# Altium PCB zynqBoard.PcbDoc
Units mm, origin at the board's own origin, x right, y up, seen from the top; angles counter-clockwise.
Board outline 209.68 x 85.72 mm, 2 copper layers (Top Layer, Bottom Layer); 108 components, 127 nets, 535 pads, 137 vias.
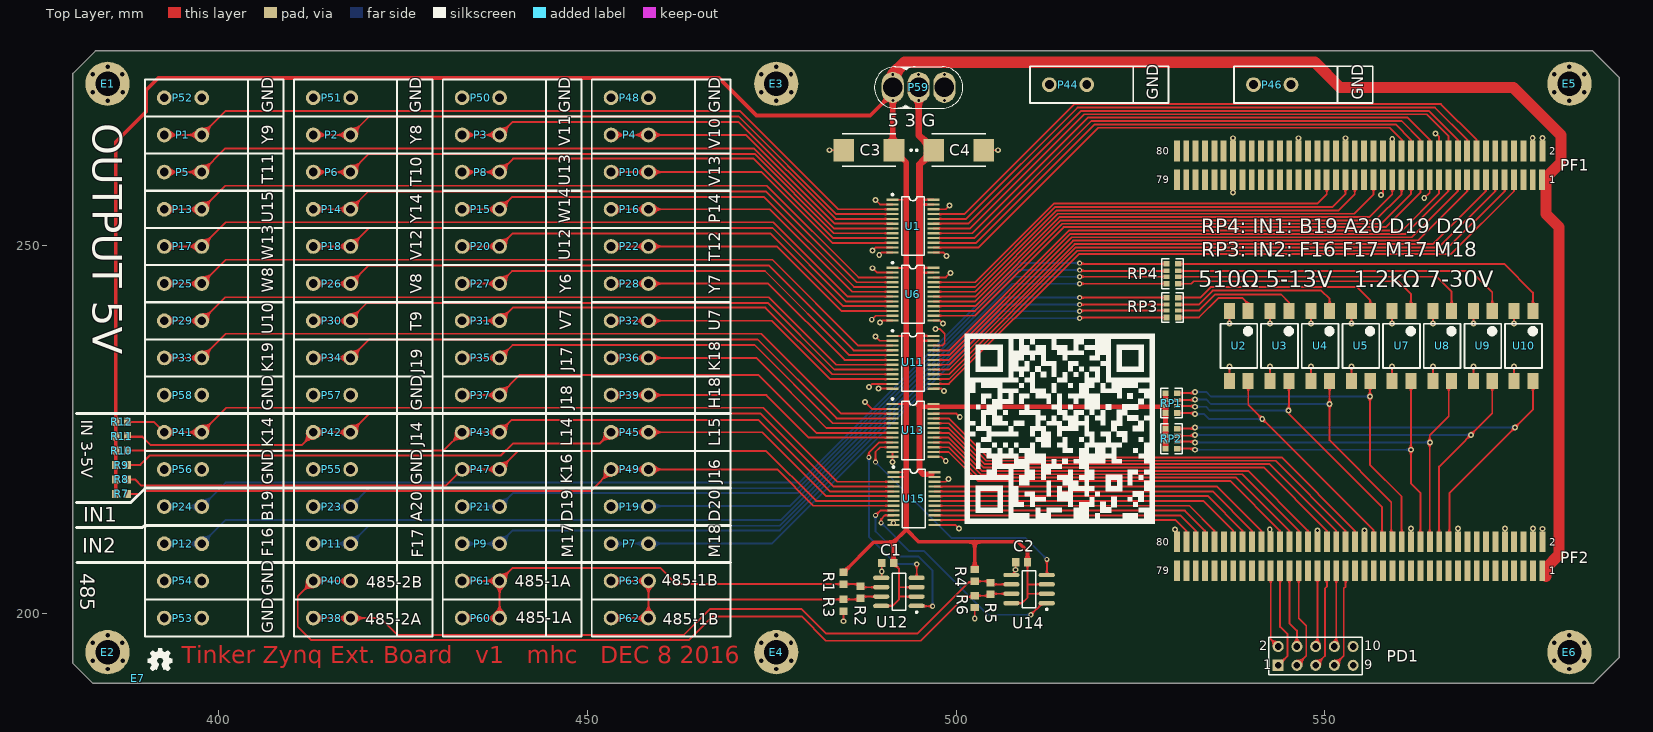
[diagram p0: Top Layer view]
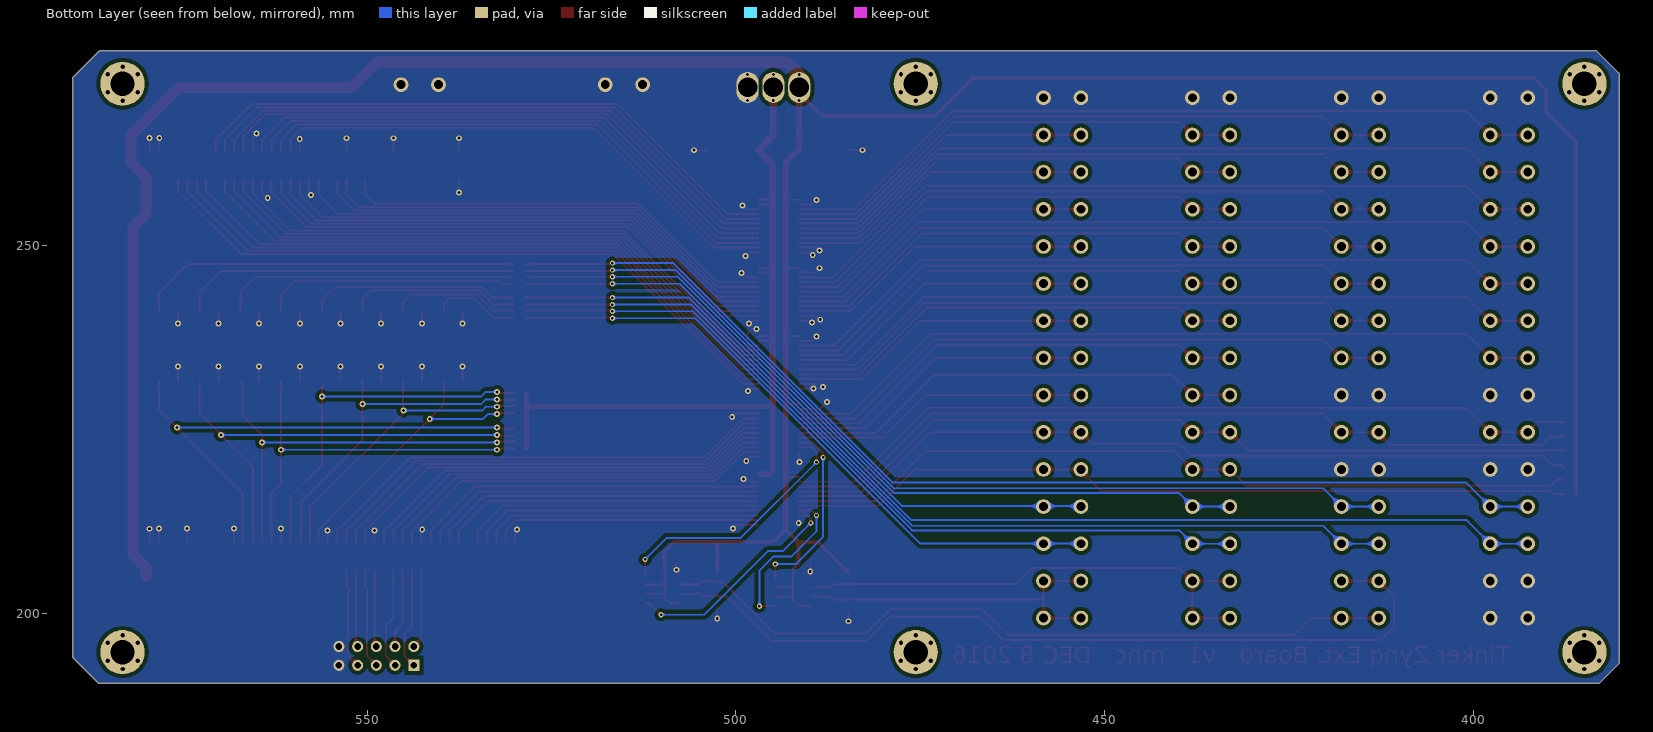
[diagram p1: Bottom Layer view, seen from below]

## Layer stack, top to bottom
Top Solder: solder mask 0.0102, Solder Resist, Dk 3.5
Top Layer: signal copper 0.0356
Dielectric 1: dielectric 0.32, FR-4, Dk 4.8
Bottom Layer: signal copper 0.0356
Bottom Solder: solder mask 0.0102, Solder Resist, Dk 3.5

## Board outline
380.238,193.294 382.905,190.627 586.486,190.627 589.915,194.056 589.915,272.796 586.359,276.352 383.286,276.352 380.238,273.304

## Design rules (kind name [scope] priority, off if disabled: settings)
Clearance [All] p1: gap=0.203 except(0.508: Arc-Poly Track-Poly SMDPad-Poly THPad-Poly Via-Poly Fill-Poly Poly-Poly)
HoleSize [All] p1: absolutevalues=TRUE maxlimit=6.3 minlimit=0.2 maxpercent=80.000 minpercent=20.000
HoleToHoleClearance [All] p1: gap=0.1 allowstackedmicrovias=TRUE
MinimumSolderMaskSliver [All] p1: minsoldermaskwidth=0.1
PlaneConnect [All] p1: planeconnectstyle=Direct reliefexpansion=0.508 reliefentries=4 reliefconductorwidth=0.254 reliefairgap=0.254
PolygonConnect [All] p1: connectstyle=Direct reliefconductorwidth=0.254 reliefentries=4 polygonreliefangle="90 Angle" airgapwidth=0.254
RoutingVias [All] p1: holewidth=0.3 width=0.6 viastyle="Through Hole" minholewidth=0.3 minwidth=0.6 maxholewidth=7 maxwidth=8
SilkToSilkClearance [All] p1: silktosilkclearance=0.1
SilkToSolderMaskClearance [IsPad] p1: minsilkscreentomaskgap=0.1 clearancetoexposedcopper=TRUE
SolderMaskExpansion [All] p1: expansion=0.102
Width [All] p1: maxlimit=2.54 minlimit=0.203 preferedwidth=0.254
24 further rules are at their usual default settings.

## Components (designator, comment, footprint, x,y, rotation, side; value= is the part's Value field where it differs from the comment)
C1 "Cap" 1608[0603]big 490.728,206.883 r0 top
C2 "Cap" 1608[0603]big 508.889,207.01 r0 top
C3 "Cap2" AVX_D_7343-31 488.188,262.89 r180 top
C4 "Cap2" AVX_D_7343-31 500.38,262.89 r0 top
E1 "铜柱" 铜柱孔 384.937,271.907 r180 top
E2 "铜柱" 铜柱孔 384.937,194.818 r180 top
E3 "铜柱" 铜柱孔 475.615,271.907 r180 top
E4 "铜柱" 铜柱孔 475.615,194.818 r180 top
E5 "铜柱" 铜柱孔 583.184,271.907 r180 top
E6 "铜柱" 铜柱孔 583.184,194.818 r180 top
E7 "OSH" OPENSOURECE 389.001,191.262 r0 top
P1 "Y9" HEADER_5.08MM_SINGLE 390,264.96 r90 top
P2 "Y8" HEADER_5.08MM_SINGLE 410.199,264.96 r90 top
P3 "V11" HEADER_5.08MM_SINGLE 430.397,264.96 r90 top
P4 "V10" HEADER_5.08MM_SINGLE 450.596,264.96 r90 top
P5 "T11" HEADER_5.08MM_SINGLE 390,259.92 r90 top
P6 "T10" HEADER_5.08MM_SINGLE 410.199,259.92 r90 top
P7 "M18" HEADER_5.08MM_SINGLE 450.596,209.52 r90 top
P8 "U13" HEADER_5.08MM_SINGLE 430.397,259.92 r90 top
P9 "M17" HEADER_5.08MM_SINGLE 430.397,209.52 r90 top
P10 "V13" HEADER_5.08MM_SINGLE 450.596,259.92 r90 top
P11 "F17" HEADER_5.08MM_SINGLE 410.199,209.52 r90 top
P12 "F16" HEADER_5.08MM_SINGLE 390,209.52 r90 top
P13 "U15" HEADER_5.08MM_SINGLE 390,254.88 r90 top
P14 "Y14" HEADER_5.08MM_SINGLE 410.199,254.88 r90 top
P15 "W14" HEADER_5.08MM_SINGLE 430.397,254.88 r90 top
P16 "P14" HEADER_5.08MM_SINGLE 450.596,254.88 r90 top
P17 "W13" HEADER_5.08MM_SINGLE 390,249.84 r90 top
P18 "V12" HEADER_5.08MM_SINGLE 410.199,249.84 r90 top
P19 "D20" HEADER_5.08MM_SINGLE 450.596,214.56 r90 top
P20 "U12" HEADER_5.08MM_SINGLE 430.397,249.84 r90 top
P21 "D19" HEADER_5.08MM_SINGLE 430.397,214.56 r90 top
P22 "T12" HEADER_5.08MM_SINGLE 450.596,249.84 r90 top
P23 "A20" HEADER_5.08MM_SINGLE 410.199,214.56 r90 top
P24 "B19" HEADER_5.08MM_SINGLE 390,214.56 r90 top
P25 "W8" HEADER_5.08MM_SINGLE 390,244.8 r90 top
P26 "V8" HEADER_5.08MM_SINGLE 410.199,244.8 r90 top
P27 "Y6" HEADER_5.08MM_SINGLE 430.397,244.8 r90 top
P28 "Y7" HEADER_5.08MM_SINGLE 450.596,244.8 r90 top
P29 "U10" HEADER_5.08MM_SINGLE 390,239.76 r90 top
P30 "T9" HEADER_5.08MM_SINGLE 410.199,239.76 r90 top
P31 "V7" HEADER_5.08MM_SINGLE 430.397,239.76 r90 top
P32 "U7" HEADER_5.08MM_SINGLE 450.596,239.76 r90 top
P33 "K19" HEADER_5.08MM_SINGLE 390,234.72 r90 top
P34 "J19" HEADER_5.08MM_SINGLE 410.199,234.72 r90 top
P35 "J17" HEADER_5.08MM_SINGLE 430.397,234.72 r90 top
P36 "K18" HEADER_5.08MM_SINGLE 450.596,234.72 r90 top
P37 "J18" HEADER_5.08MM_SINGLE 430.397,229.68 r90 top
P38 "485-2A" HEADER_5.08MM_SINGLE 410.199,199.44 r90 top
P39 "H18" HEADER_5.08MM_SINGLE 450.596,229.68 r90 top
P40 "485-2B" HEADER_5.08MM_SINGLE 410.199,204.48 r90 top
P41 "K14" HEADER_5.08MM_SINGLE 390,224.64 r90 top
P42 "J14" HEADER_5.08MM_SINGLE 410.199,224.64 r90 top
P43 "L14" HEADER_5.08MM_SINGLE 430.397,224.64 r90 top
P44 "GND" HEADER_5.08MM_SINGLE 510.032,271.78 r90 top
P45 "L15" HEADER_5.08MM_SINGLE 450.596,224.64 r90 top
P46 "GND" HEADER_5.08MM_SINGLE 537.718,271.78 r90 top
P47 "K16" HEADER_5.08MM_SINGLE 430.397,219.6 r90 top
P48 "GND" HEADER_5.08MM_SINGLE 450.596,270 r90 top
P49 "J16" HEADER_5.08MM_SINGLE 450.596,219.6 r90 top
P50 "GND" HEADER_5.08MM_SINGLE 430.397,270 r90 top
P51 "GND" HEADER_5.08MM_SINGLE 410.199,270 r90 top
P52 "GND" HEADER_5.08MM_SINGLE 390,270 r90 top
P53 "GND" HEADER_5.08MM_SINGLE 390,199.44 r90 top
P54 "GND" HEADER_5.08MM_SINGLE 390,204.48 r90 top
P55 "GND" HEADER_5.08MM_SINGLE 410.199,219.6 r90 top
P56 "GND" HEADER_5.08MM_SINGLE 390,219.6 r90 top
P57 "GND" HEADER_5.08MM_SINGLE 410.199,229.68 r90 top
P58 "GND" HEADER_5.08MM_SINGLE 390,229.68 r90 top
P59 "POWER" MR30 494.919,271.399 r90 top
P60 "485-1A" HEADER_5.08MM_SINGLE 430.397,199.44 r90 top
P61 "485-1A" HEADER_5.08MM_SINGLE 430.397,204.48 r90 top
P62 "485-1B" HEADER_5.08MM_SINGLE 450.596,199.44 r90 top
P63 "485-1B" HEADER_5.08MM_SINGLE 450.596,204.48 r90 top
PD1 "DEBUG" HDR2X5 543.687,193.04 r0 top
PF1 "MHDR2*40" sbMHeader2*40 529.946,258.88 r0 top
PF2 "MHDR2*40" sbMHeader2*40 529.971,205.867 r0 top
R1 "Res2" 1608[0603]big 484.759,204.851 r90 top
R2 "Res2" 1608[0603]big 487.045,202.946 r90 top
R3 "Res2" 1608[0603]big 484.759,201.168 r90 top
R4 "Res2" 1608[0603]big 502.539,205.232 r90 top
R5 "Res2" 1608[0603]big 504.698,203.454 r90 top
R6 "Res2" 1608[0603]big 502.539,201.676 r90 top
R7 "" 1608[0603]big 386.842,216.281 r0 top
R8 "" 1608[0603]big 386.842,218.237 r0 top
R9 "" 1608[0603]big 386.842,220.193 r0 top
R10 "" 1608[0603]big 386.842,222.148 r0 top
R11 "" 1608[0603]big 386.842,224.104 r0 top
R12 "" 1608[0603]big 386.842,226.06 r0 top
RP1 "ResPack" LC-0603_Rx4 529.209,228.6 r90 top
RP2 "ResPack" LC-0603_Rx4 529.209,223.774 r90 top
RP3 "ResPack" LC-0603_Rx4 529.336,241.554 r90 top
RP4 "ResPack" LC-0603_Rx4 529.336,246.126 r90 top
U1 "SN74LVC4245PW" PW024 494.157,252.603 r270 top
U2 "Optoisolator1" LC-SMD-4 538.353,236.347 r270 top
U3 "Optoisolator1" LC-SMD-4 543.868,236.347 r270 top
U4 "Optoisolator1" LC-SMD-4 549.384,236.347 r270 top
U5 "Optoisolator1" LC-SMD-4 554.899,236.347 r270 top
U6 "SN74LVC4245PW" PW024 494.157,243.364 r270 top
U7 "Optoisolator1" LC-SMD-4 560.415,236.347 r270 top
U8 "Optoisolator1" LC-SMD-4 565.93,236.347 r270 top
U9 "Optoisolator1" LC-SMD-4 571.446,236.347 r270 top
U10 "Optoisolator1" LC-SMD-4 576.961,236.347 r270 top
U11 "SN74LVC4245PW" PW024 494.157,234.124 r270 top
U12 "MAX485CSA" NSO8_N 492.252,202.993 r180 top
U13 "SN74LVC4245PW" PW024 494.157,224.885 r270 top
U14 "MAX485CSA" NSO8_N 509.905,203.374 r180 top
U15 "SN74LVC4245PW" PW024 494.284,215.646 r270 top

## Footprints (in the part's own frame and the unit in brackets; to place one, negate y for a bottom-side part, rotate by r counter-clockwise, add the part's x,y. Pads: shape width x height; smd on the part's side, far side on the other; paste and mask are expansions set on the pad)
1608[0603]big [mm] "Chip Capacitor, Body 1.6x0.8mm, IPC High Density"
  rect 1x1.1 smd: 1(-0.8,0) 2(0.8,0)
  body extent -0.87,-0.48 0.87,0.48, height 1.3
AVX_D_7343-31 [mm]
  rect 2.8x3 smd: 1(-3.4,0) 2(3.4,0)
  silkscreen extent -5.84,-2.2 3.65,2.2
HDR2X5 [mm] "Connector; Header; 5x2 Position"
  rect 1.5x1.5 hole 0.9: 1(0,0)
  round 1.5 hole 0.9: 2(0,2.54) 3(2.54,0) 4(2.54,2.54) 5(5.08,0) 6(5.08,2.54) 7(7.62,0) 8(7.62,2.54) 9(10.16,0) 10(10.16,2.54)
  silkscreen extent -1.27,-1.27 11.43,3.81
HEADER_5.08MM_SINGLE [mm]
  round 2 hole 1.2: 1(0,-2.62) 1(0,-7.7)
  silkscreen extent -2.5,-18.8 2.5,0
LC-0603_Rx4 [mm]
  rect 0.75x0.84 smd mask+0.051: 1(-1.35,-0.8) 4(1.35,-0.8) 5(1.35,0.8) 8(-1.35,0.8)
  rect 0.58x0.84 smd mask+0.051: 2(-0.4,-0.8) 3(0.4,-0.8) 6(0.4,0.8) 7(-0.4,0.8)
  silkscreen extent -2.03,-1.47 2.02,1.47
LC-SMD-4 [mm]
  rect 2.2x1.5 smd: 1(-4.75,1.27) 2(-4.75,-1.27) 3(4.75,-1.27) 4(4.75,1.27)
  silkscreen extent -3,-2.5 3,2.5
MR30 [mm]
  oval 4.2x3 hole 2.65: 1(0,3.5) 2(0,0) 3(0,-3.5)
  silkscreen extent -2.8,-6 2.8,6
NSO8_N [mm] "SOIC, 8-Leads, Body 4.9x3.9mm, Pitch 1.27mm, IPC Medium Density"
  oval 2.2x0.6 smd: 1(-2.4,1.905) 2(-2.4,0.635) 3(-2.4,-0.635) 4(-2.4,-1.905) 5(2.4,-1.905) 6(2.4,-0.635) 7(2.4,0.635) 8(2.4,1.905)
  silkscreen extent -2.53,-2.5 0.9,2.88, body extent -2,-2.5 2,2.5, height 1.75
OPENSOURECE [mm]
  silkscreen extent 1.4,1.09 4.74,4.1
PW024 [mm] "Shrink Small Outline; 24 Leads; Body Width 4.4 mm; Pitch 0.65 mm"
  rect 0.3x1.65 smd: 1(-3.575,-2.775) 2(-2.925,-2.775) 3(-2.275,-2.775) 4(-1.625,-2.775) 5(-0.975,-2.775) 6(-0.325,-2.775) 7(0.325,-2.775) 8(0.975,-2.775) 9(1.625,-2.775) 10(2.275,-2.775) 11(2.925,-2.775) 12(3.575,-2.775) 13(3.575,2.775) 14(2.925,2.775) 15(2.275,2.775) 16(1.625,2.775) 17(0.975,2.775) 18(0.325,2.775) 19(-0.325,2.775) 20(-0.975,2.775) 21(-1.625,2.775) 22(-2.275,2.775) 23(-2.925,2.775) 24(-3.575,2.775)
  silkscreen extent -4.4,-2.9 3.95,1.55
sbMHeader2*40 [mm]
  rect 0.8x2.8 smd: 1(49.53,0) 2(49.56,3.9) 3(48.26,0) 4(48.26,3.9) 5(46.99,0) 6(46.99,3.9) 7(45.72,0) 8(45.72,3.9) 9(44.45,0) 10(44.45,3.9) 11(43.18,0) 12(43.18,3.9) 13(41.91,0) 14(41.91,3.9) 15(40.64,0) 16(40.64,3.9) 17(39.37,0) 18(39.37,3.9) 19(38.1,0) 20(38.1,3.9) 21(36.83,0) 22(36.83,3.9) 23(35.56,0) 24(35.56,3.9) 25(34.29,0) 26(34.29,3.9) 27(33.02,0) 28(33.02,3.9) 29(31.75,0) 30(31.75,3.9) 31(30.48,0) 32(30.48,3.9) 33(29.21,0) 34(29.21,3.9) 35(27.94,0) 36(27.94,3.9) 37(26.67,0) 38(26.67,3.9) 39(25.4,0) 40(25.4,3.9) 41(24.13,0) 42(24.13,3.9) 43(22.86,0) 44(22.86,3.9) 45(21.59,0) 46(21.59,3.9) 47(20.32,0) 48(20.32,3.9) 49(19.05,0) 50(19.05,3.9) 51(17.78,0) 52(17.78,3.9) 53(16.51,0) 54(16.51,3.9) 55(15.24,0) 56(15.24,3.9) 57(13.97,0) 58(13.97,3.9) 59(12.7,0) 60(12.7,3.9) 61(11.43,0) 62(11.43,3.9) 63(10.16,0) 64(10.16,3.9) 65(8.89,0) 66(8.89,3.9) 67(7.62,0) 68(7.62,3.9) 69(6.35,0) 70(6.35,3.9) 71(5.08,0) 72(5.08,3.9) 73(3.81,0) 74(3.81,3.9) 75(2.54,0) 76(2.54,3.9) 77(1.27,0) 78(1.27,3.9) 79(0,0) 80(0,3.9)
铜柱孔 [mm]
  round 6 hole 3.3: 1(0,0)

## Part data
C1 C2 C3 C4: "Capacitor"
E1 E2 E3 E4 E5 E6 E7: library part Antenna, "Generic Antenna"
P1 P2 P3 P4 P5 P6 P7 P8 P9 P10 P11 P12 P13 P14 P15 P16 P17 P18 P19 P20 P21 P22 P23 P24 P25 P26 P27 P28 P29 P30 P31 P32 P33 P34 P35 P36 P37 P38 P39 P40 P41 P42 P43 P44 P45 P46 P47 P48 P49 P50 P51 P52 P53 P54 P55 P56 P57 P58 P60 P61 P62 P63: library part conn
P59: library part XT30-3P, "XT30-3P"
PD1: library part "Header 5X2", "Header, 5-Pin, Dual row"
R1 R2 R3 R4 R5 R6: "Resistor"
R7 R8 R9 R10 R11 R12: library part Res2, "Resistor"
RP1 RP2 RP3 RP4: library part ResPackx4
U1 U6 U11 U13 U15: "Octal Bus Transceiver and 3.3-V to 5-V Shifter with 3-State Outputs"
U2 U3 U4 U5 U7 U8 U9 U10: "4-Pin Phototransistor Optocoupler"
U12 U14: "Low-Power, Slew-Rate-Limited RS-485/RS-422 Transceiver"

## Via types
v1: diameter 0.8, hole 0.4, Top Layer to Bottom Layer, tented both sides, 79 vias
v2: diameter 0.6, hole 0.6, Top Layer to Bottom Layer, tented both sides, 36 vias
v3: diameter 0.7, hole 0.35, Top Layer to Bottom Layer, tented both sides, 16 vias
v4: diameter 0.4, hole 0.4, Top Layer to Bottom Layer, tented both sides, 6 vias

## Nets (pads, with @x,y where several pads share a name; then routed paths per layer and width w, separated by ;. In a path a pad name is that pad's centre, name@x,y a point inside that pad or via, vN(x,y) a via of type N, cw(c..) or ccw(c..) an arc to the next point about the centre after c; other vN are vias at no path point)
3V3: C4.1 P59.2 RP1.5 RP1.6 RP1.7 RP1.8 RP2.5 RP2.6 RP2.7 RP2.8 U1.23 U1.24 U6.23 U6.24 U11.23 U11.24 U13.23 U13.24 U15.23 U15.24 | length 107.5
  Top Layer w0.279: 495.05,255.528 U1.23 ; 495.065,256.178 U1.24 ; 495.091,237.699 U11.24 ; 495.097,246.939 U6.24 ; 495.113,237.049 U11.23 ; 495.137,246.289 U6.23
  Top Layer w0.508: RP1.7@528.301,228.092 RP1.7 RP1.6 RP1.5
  Top Layer w0.635: 495.046,228.219 495.173,228.092 RP1.7@528.301,228.092 ; RP2.8 RP2.7 RP2.6 RP2.5 RP1.8 RP1.7
  Top Layer w0.762: 495.046,228.219 495.046,219.456 495.554,218.948 496.697,218.948
  Top Layer w0.889: P59.2 494.919,264.951 C4.1 495.046,260.956 495.046,228.219
  other v4: 494.944,269.649 494.919,273.149
5V: C1.2 C2.2 C3.1 P59.1 PF1.1 PF2.1 R1.2 R4.2 R7.1 R8.1 R9.1 R10.1 R11.1 R12.1 U1.1 U6.1 U11.1 U12.2 U12.3 U12.8 U13.1 U14.2 U14.3 U14.8 U15.1 U15.2 | length 454.4
  Top Layer w0.254: U12.8 491.41,201.088 492.252,201.93 492.252,206.159 C1.2 ; U13.1 493.255,228.46 ; U11.1 493.186,237.699 ; U6.1 493.217,246.939 ; U1.1 493.249,256.178 ; U15.2 493.264,218.571 ; U15.1 493.249,219.221 ; 492.332,202.358 U12.2 ; 492.332,203.628 U12.3 ; U14.8 508.936,201.469 509.689,202.222 509.689,202.692 ; C2.2 509.689,202.692 ; 509.769,204.009 U14.3 ; U14.2 509.736,202.739 509.689,202.692
  Top Layer w0.508: R7.1 R8.1 R9.1 R10.1 R11.1 R12.1 386.042,263.995 390.144,268.097 390.144,271.018 391.795,272.669 467.868,272.669 472.948,267.589 488.371,267.589 491.419,270.637 P59.1 ; R1.2 488.823,209.715 491.528,209.715 ; C1.2 491.528,209.715 ; R4.2 502.539,209.804 ; C2.2 509.689,208.496 508.381,209.804 502.539,209.804 ; 491.528,209.715 493.268,211.455 494.919,209.804 502.539,209.804
  Top Layer w0.762: P59.1@491.419,270.637 491.419,263.059 C3.1 493.268,261.21 493.268,211.455
  Top Layer w1.524: P59.1 v4(491.419,273.149) 491.419,273.233 493.014,274.828 548.64,274.828 552.069,271.399 575.564,271.399 582.041,264.922 582.041,261.239 580.009,259.207 580.009,254.254 581.787,252.476 581.787,208.026 580.009,206.248 580.009,205.105
  other v4: 491.444,269.649
485-1A: P60.1 P61.1 R1.1 R2.2 U12.6 | length 68.8
  Top Layer w0.254: P60.1@433.017,199.44 438.097,199.44 P61.1@438.097,204.48 ; P61.1@433.017,204.48 P61.1@438.097,204.48 ; U12.6 487.163,203.628 R2.2 486.74,204.051 R1.1 462.064,204.051 459.867,206.248 439.865,206.248 P61.1@438.097,204.48
485-1B: P62.1 P63.1 R2.1 R3.2 U12.7 | length 46.9
  Top Layer w0.254: P62.1@453.216,199.44 458.296,199.44 458.296,201.96 ; P63.1@453.216,204.48 458.296,204.48 458.296,201.96 ; U12.7 487.257,202.358 R2.1 486.867,201.968 R3.2 458.304,201.968 458.296,201.96
485-1RX: U12.1 U15.9 | length 21.8
  Top Layer w0.254: v3(489.077,213.36) 489.738,214.021 U15.9 ; U12.1 494.699,201.041 v3(496.824,201.041)
  Bottom Layer w0.254: v3(489.077,213.36) 489.077,211.201 492.506,207.772 494.919,207.772 496.824,205.867 v3(496.824,201.041)
485-1TX: U12.4 U13.9 | length 25.1
  Top Layer w0.254: v3(488.188,221.234) 488.188,221.869 489.579,223.26 U13.9 ; U12.4 494.665,204.911 v3(494.665,206.756)
  Bottom Layer w0.254: v3(488.188,221.234) 488.188,210.439 491.871,206.756 v3(494.665,206.756)
485-2A: P38.1 R4.1 R5.2 U14.6 | length 101.3
  Top Layer w0.254: P38.1@412.819,199.44 417.899,199.44 421.971,199.44 424.243,197.167 463.106,197.167 466.598,200.66 479.044,200.66 482.346,197.358 494.792,197.358 501.739,204.305 502.412,204.305 R4.1 R5.2@504.52,204.432 ; R5.2 504.943,204.009 U14.6
485-2B: P40.1 R5.1 R6.2 U14.7 | length 114.8
  Top Layer w0.254: P40.1@417.899,204.48 412.819,204.48 410.718,202.379 410.718,198.247 412.496,196.469 463.804,196.469 467.007,199.672 479.044,199.672 482.346,196.37 495.201,196.37 501.18,202.349 502.412,202.349 R6.2 R5.1@504.52,202.476 ; R5.1 504.783,202.739 U14.7
485-2RX: U14.1 U15.10 | length 30.7
  Top Layer w0.254: v3(489.839,212.344) 489.839,212.852 490.358,213.371 U15.10 ; v3(510.159,199.898) 511.73,201.469 U14.1
  Bottom Layer w0.254: v3(489.839,212.344) 493.649,208.534 495.681,208.534 504.317,199.898 v3(510.159,199.898)
485-2TX: U13.10 U14.4 | length 34.8
  Top Layer w0.254: v3(489.077,220.599) 489.077,221.996 489.691,222.61 U13.10 ; U14.4 512.318,205.292 v3(512.318,207.391)
  Bottom Layer w0.254: v3(489.077,220.599) 499.364,210.312 509.397,210.312 v3(512.318,207.391)
A20: PF2.24 RP2.3 U9.4 | length 64.7
  Top Layer w0.254: RP2.3 v1@532.282,224.174 ; v1@532.555,224.174 v1@532.657,224.276 ; PF2.24@565.506,209.78 565.506,219.985 572.716,227.195 U9.4
  Bottom Layer w0.254: v1(532.384,224.276) v1(569.843,224.276)
A20H: P21.1 RP4.7 | length 108.4
  Top Layer w0.254: v3(516.763,245.726) RP4.7
  Bottom Layer w0.254: P21.1@433.017,214.56 438.097,214.56 439.945,216.408 478.605,216.408 507.923,245.726 v3(516.763,245.726)
B19: PF2.22 RP2.4 U10.4 | length 72.4
  Top Layer w0.254: RP2.4 v1@532.229,225.124 ; v1@532.502,225.124 v1@532.657,225.279 ; PF2.22@566.776,209.78 566.903,209.907 566.903,216.383 v1(575.799,225.279) 578.231,227.711 U10.4
  Bottom Layer w0.254: v1(532.384,225.279) v1(575.799,225.279)
B19H: P19.1 RP4.8 | length 87.8
  Top Layer w0.254: v3(516.763,244.776) RP4.8
  Bottom Layer w0.254: P19.1@453.216,214.56 453.286,214.63 477.474,214.63 507.62,244.776 v3(516.763,244.776)
D19: PF2.26 RP2.2 U8.4 | length 57.3
  Top Layer w0.254: RP2.2 v1@532.282,223.374 ; v1@532.555,223.374 v1@532.657,223.272 ; PF2.26@564.236,209.78 564.236,224.23 566.819,226.814 566.819,231.216 U8.4
  Bottom Layer w0.254: v1(532.384,223.272) v1(564.255,223.272)
D19H: P23.1 RP4.6 | length 129
  Top Layer w0.254: v3(516.763,246.629) 516.866,246.526 RP4.6
  Bottom Layer w0.254: P23.1@412.819,214.56 417.899,214.56 420.382,217.043 478.594,217.043 508.18,246.629 v3(516.763,246.629)
D20: PF2.28 RP2.1 U7.4 | length 54.1
  Top Layer w0.254: RP2.1 v1@532.229,222.424 ; v1@532.502,222.424 v1@532.657,222.269 ; U7.4 561.685,217.714 562.966,216.433 PF2.28@562.966,209.78
  Bottom Layer w0.254: v1(532.384,222.269) v1(561.702,222.269)
D20H: P24.1 RP4.5 | length 149.6
  Top Layer w0.254: v3(516.763,247.579) 516.866,247.476 RP4.5
  Bottom Layer w0.254: P24.1@392.62,214.56 397.7,214.56 400.945,217.805 478.709,217.805 508.483,247.579 v3(516.763,247.579)
DBG1: PD1.2 PF2.59 | length 10.7
  Top Layer w0.254: PF2.59 542.671,196.596 PD1.2
DBG2: PD1.1 PF2.57 | length 13.8
  Top Layer w0.254: PD1.1 544.957,194.31 544.957,197.231 543.941,198.247 PF2.57
DBG3: PD1.4 PF2.55 | length 10.7
  Top Layer w0.254: PF2.55 545.211,198.755 546.227,197.739 PD1.4
DBG4: PD1.3 PF2.53 | length 13.8
  Top Layer w0.254: PD1.3 547.497,194.31 547.497,198.374 546.481,199.39 PF2.53
DBG5: PD1.6 PF2.49 | length 10.4
  Top Layer w0.254: PD1.6 549.021,195.834 PF2.49
DBG6: PD1.5 PF2.47 | length 13.5
  Top Layer w0.254: PD1.5 550.037,194.31 550.037,203.454 550.291,203.708 PF2.47
DBG7: PD1.8 PF2.45 | length 10.4
  Top Layer w0.254: PD1.8 551.561,195.834 PF2.45
DBG8: PD1.7 PF2.43 | length 13.5
  Top Layer w0.254: PD1.7 552.577,194.31 552.577,203.454 552.831,203.708 PF2.43
F16: PF2.32 RP1.4 U5.4 | length 49.9
  Top Layer w0.254: RP1.4@529.882,229.95 RP1.4 v1@532.229,229.95 ; v1@532.502,229.95 v1@532.657,230.105 ; U5.4@555.788,231.216 556.133,230.871 v1(556.133,229.489) 556.133,220.218 560.426,215.925 PF2.32@560.426,209.78
  Bottom Layer w0.254: v1(532.384,230.105) 533.927,230.105 534.543,229.489 v1(556.133,229.489)
F16H: P12.1 RP3.5 | length 149.7
  Top Layer w0.254: v3(516.763,242.904) RP3.5
  Bottom Layer w0.254: P12.1@392.62,209.52 397.7,209.52 400.905,212.725 476.215,212.725 506.394,242.904 v3(516.763,242.904)
F17: PF2.34 RP1.3 U4.4 | length 46.4
  Top Layer w0.254: RP1.3@529.882,229 RP1.3 v1@532.282,229 ; v1@532.555,229 v1@532.657,229.102 ; U4.4 550.654,223.538 559.029,215.163 559.029,209.907 PF2.34@559.156,209.78
  Bottom Layer w0.254: v1(532.384,229.102) 533.914,229.102 534.543,228.473 v1(550.672,228.473)
F17H: P11.1 RP3.6 | length 129.2
  Top Layer w0.254: v3(516.763,241.954) RP3.6
  Bottom Layer w0.254: P11.1@412.819,209.52 417.899,209.52 420.342,211.963 476.1,211.963 506.091,241.954 v3(516.763,241.954)
G15: PF2.69
G19: P41.1 R12.2 U15.3 | length 110
  Top Layer w0.254: P41.1@392.62,224.64 397.7,224.64 401.025,227.965 473.837,227.965 483.881,217.921 U15.3
  Top Layer w0.279: R12.2 391.2,226.06 P41.1@392.62,224.64
G20: P42.1 R11.2 U15.4 | length 110.5
  Top Layer w0.254: P42.1@413.004,224.64 417.899,224.64 420.462,227.203 473.456,227.203 483.388,217.271 U15.4
  Top Layer w0.279: R11.2 387.718,224.028 389.636,224.028 390.779,222.885 411.249,222.885 413.004,224.64 P42.1@412.819,224.64
GND: C1.1 C2.1 C3.2 C4.2 P44.1 P46.1 P48.1 P50.1 P51.1 P52.1 P53.1 P54.1 P55.1 P56.1 P57.1 P58.1 P59.3 PD1.9 PD1.10 PF1.2 PF1.4 PF1.24 PF1.25 PF1.34 PF1.35 PF1.44 PF1.54 PF1.67 PF1.68 PF2.2 PF2.4 PF2.10 PF2.20 PF2.30 PF2.40 PF2.50 PF2.60 PF2.80 R3.1 R6.1 U1.2 U1.11 U1.12 U1.13 U1.22 U2.2 U2.3 U3.2 U3.3 U4.2 U4.3 U5.2 U5.3 U6.2 U6.11 U6.12 U6.13 U6.22 U7.2 U7.3 U8.2 U8.3 U9.2 U9.3 U10.2 U10.3 U11.2 U11.11 U11.12 U11.13 U11.22 U12.5 U13.2 U13.11 U13.12 U13.13 U13.22 U14.5 U15.11 U15.12 U15.13 U15.22 | length 129.8
  Top Layer w0.254: v1(482.854,262.89) C3.2 ; v1(484.759,199.009) R3.1 ; v1(487.68,228.727) 488.597,227.81 U13.2 ; v1(488.188,230.759) 488.629,231.2 U11.11 ; v1(488.569,239.903) 489.105,240.439 U6.11 ; v1(488.696,246.888) 489.295,246.289 U6.2 ; v1(488.696,249.301) 489.073,249.678 U1.11 ; v1(489.077,237.617) 489.645,237.049 U11.2 ; v1(489.077,256.159) 489.708,255.528 U1.2 ; v1(489.503,230.55) U11.12 ; v1(489.585,248.666) 489.947,249.028 U1.12 ; v1(489.712,239.522) 489.979,239.789 U6.12 ; U12.5 489.928,204.974 v1(489.928,205.74) C1.1 ; v1(491.382,220.58) U13.12 U13.11 ; v1(491.49,212.344) 491.509,212.363 U15.11 ; U13.13 498.018,221.31 v1(498.602,220.726) ; U13.22 500.042,227.16 v1(500.507,226.695) ; U11.13 498.049,230.55 v1(498.348,230.251) ; U11.22 498.147,236.4 498.475,236.728 498.475,237.998 497.84,238.633 v1(497.205,238.633) ; U6.13 497.827,239.789 v1(498.221,239.395) ; U6.22 498.623,245.639 v1(499.237,246.253) ; U1.13 498.24,249.028 v1(498.729,248.539) ; U1.22 498.591,254.878 v1(499.11,255.397) ; U15.13 499.891,212.071 v1(500.38,211.582) ; U15.22 498.591,217.921 v1(498.983,218.313) ; v1(502.539,199.39) R6.1 ; C4.2 v1(505.714,262.89) ; U14.5 508.089,205.863 v1(508.089,205.994) C2.1 ; v1(529.717,211.455) 529.971,211.201 PF2.80 ; U2.3 v1(537.083,233.553) ; v1(537.083,239.395) U2.2 ; v1(537.566,257.15) PF1.67 ; PF1.68 v1(537.566,264.516) ; v1(542.544,211.455) 542.671,211.328 PF2.60 ; U3.3 v1(542.598,233.553) ; v1(542.598,239.395) U3.2 ; PF1.54 v1(546.456,264.516) ; U4.3 v1(548.114,233.553) ; v1(548.114,239.395) U4.2 ; PF2.50 v1(549.021,211.328) ; PF1.44 v1(552.806,264.516) ; U5.3 v1(553.629,233.553) ; v1(553.629,239.395) U5.2 ; PF2.40 v1(555.371,211.328) ; v1(557.657,256.794) 557.886,257.023 PF1.35 ; U7.3 v1(559.145,233.553) ; v1(559.145,239.395) U7.2 ; PF1.34 v1(559.156,264.389) ; PF2.30 v1(561.721,211.582) ; v1(563.499,256.413) 564.236,257.15 PF1.25 ; U8.3 v1(564.66,233.553) ; v1(564.66,239.395) U8.2 ; v1(565.023,265.176) 565.506,264.693 PF1.24 ; PF2.20 v1(568.071,211.582) ; U9.3 v1(570.176,233.553) ; v1(570.176,239.395) U9.2 ; PF2.10 v1(574.421,211.582) ; U10.3 v1(575.691,233.553) ; v1(575.691,239.395) U10.2 ; PF1.4 v1(578.206,264.566) ; PF2.4 v1(578.231,211.582) ; PF1.2 v1(579.506,264.536) ; PF2.2 v1(579.531,211.552)
  other v4: 498.444,269.649 498.419,273.149
H15: PF2.67
H18: P39.1 U13.8 | length 40.6
  Top Layer w0.254: P39.1@453.216,229.68 458.296,229.68 474.281,229.68 480.051,223.91 U13.8
H20: PF2.65
J14: P45.1 R9.2 U15.6 | length 109.5
  Top Layer w0.254: P45.1@453.216,224.64 458.296,224.64 473.733,224.64 482.402,215.971 U15.6
  Top Layer w0.279: R9.2@387.642,219.786 388.074,220.218 389.382,220.218 390.652,221.488 438.277,221.488 439.928,223.139 451.715,223.139 P45.1@453.216,224.64
J16: PF2.78 U15.14 | length 36.3
  Top Layer w0.254: U15.14 529.801,212.721 531.216,211.307 PF2.78@531.216,209.78
J18: P37.1 U13.7 | length 62.7
  Top Layer w0.254: P37.1@433.017,229.68 438.097,229.68 440.827,232.41 473.202,232.41 481.052,224.56 U13.7
J19: P34.1 U13.4 | length 84
  Top Layer w0.254: P34.1@412.819,234.72 417.899,234.72 420.415,237.236 473.075,237.236 483.801,226.51 U13.4
J20: PF2.63
K14: P43.1 R10.2 U15.5 | length 109.6
  Top Layer w0.254: P43.1@433.017,224.64 438.097,224.64 439.771,226.314 473.202,226.314 482.895,216.621 U15.5
  Top Layer w0.279: R10.2@387.642,222.174 430.551,222.174 P43.1@433.017,224.64
K16: PF2.76 U15.15 | length 37.8
  Top Layer w0.254: U15.15 530.421,213.371 532.486,211.307 PF2.76@532.486,209.78
K17: P35.1 U13.5 | length 63.5
  Top Layer w0.254: P35.1@433.017,234.72 438.097,234.72 439.851,236.474 472.694,236.474 483.308,225.86 U13.5
K18: P36.1 U13.6 | length 42.1
  Top Layer w0.254: P36.1@453.216,234.72 458.296,234.72 472.924,234.72 482.434,225.21 U13.6
K19: P33.1 U13.3 | length 104.6
  Top Layer w0.254: P33.1@392.62,234.72 397.7,234.72 400.978,237.998 473.583,237.998 484.421,227.16 U13.3
L14: P47.1 R8.2 U15.7 | length 109
  Top Layer w0.254: P47.1@433.017,219.6 438.097,219.6 440.62,222.123 474.218,222.123 481.02,215.321 U15.7
  Top Layer w0.279: R8.2 388.671,218.237 389.509,217.399 430.816,217.399 P47.1@433.017,219.6
L15: P49.1 R7.2 U15.8 | length 107.5
  Top Layer w0.254: P49.1@453.39,219.6 458.296,219.6 475.725,219.6 480.654,214.671 U15.8
  Top Layer w0.279: R7.2 389.255,216.281 389.636,216.662 450.452,216.662 453.39,219.6 P49.1@453.216,219.6
M14: PF2.77
M15: PF2.79
M17: PF2.36 RP1.2 U3.4 | length 42.1
  Top Layer w0.254: RP1.2@529.882,228.2 RP1.2 v1@532.282,228.2 ; v1@532.555,228.2 v1@532.657,228.098 ; 545.138,227.149 557.759,214.528 557.759,209.907 PF2.36@557.886,209.78 ; v1@545.138,227.584 U3.4
  Bottom Layer w0.254: v1(532.384,228.098) 533.902,228.098 534.416,227.584 v1(545.084,227.584)
M17H: P9.1 RP3.7 | length 108.6
  Top Layer w0.254: v3(516.763,241.051) 516.866,241.154 RP3.7
  Bottom Layer w0.254: P9.1@433.017,209.52 438.097,209.52 439.905,211.328 476.111,211.328 505.834,241.051 v3(516.763,241.051)
M18: PF2.38 RP1.1 U2.4 | length 40.8
  Top Layer w0.254: RP1.1@529.882,227.25 RP1.1 v1@532.229,227.25 ; v1@532.502,227.25 v1@532.657,227.095 ; U2.4 539.623,228.346 v1(541.528,226.441) 556.616,211.353 PF2.38@556.616,209.78
  Bottom Layer w0.254: v1(532.384,227.095) 533.635,227.095 534.289,226.441 v1(541.528,226.441)
M18H: P7.1 RP3.8 | length 88
  Top Layer w0.254: v3(516.763,240.101) 516.866,240.204 RP3.8
  Bottom Layer w0.254: P7.1@453.216,209.52 453.246,209.55 474.98,209.55 505.531,240.101 v3(516.763,240.101)
N15: PF2.73
N16: PF2.75
NetPF1_7: PF1.7 U11.14 | length 91.1
  Top Layer w0.254: U11.14 499.043,231.2 516.636,248.793 567.106,248.793 575.666,257.353 PF1.7
NetPF1_9: PF1.9 U11.15 | length 89.6
  Top Layer w0.254: U11.15 499.046,231.849 516.447,249.25 566.293,249.25 574.396,257.353 PF1.9
NetPF1_11: PF1.11 U11.16 | length 88
  Top Layer w0.254: U11.16 499.049,232.5 516.257,249.707 565.48,249.707 573.126,257.353 PF1.11
NetPF1_13: PF1.13 U11.17 | length 86.5
  Top Layer w0.254: U11.17 499.053,233.149 516.068,250.165 564.668,250.165 571.856,257.353 PF1.13
NetPF1_16: PF1.16 U1.21 | length 83.4
  Top Layer w0.254: U1.21 501.116,254.228 516.026,269.138 565.754,269.138 570.586,264.307 PF1.16
NetPF1_17: PF1.17 U11.18 | length 83.7
  Top Layer w0.254: U11.18 499.056,233.8 515.878,250.622 562.585,250.622 569.316,257.353 PF1.17
NetPF1_18: PF1.18 U1.20 | length 82
  Top Layer w0.254: U1.20 501.385,253.578 516.488,268.681 564.941,268.681 569.316,264.307 PF1.18
NetPF1_19: PF1.19 U11.19 | length 82.1
  Top Layer w0.254: U11.19 499.06,234.449 515.689,251.079 561.772,251.079 568.046,257.353 PF1.19
NetPF1_20: PF1.20 U1.19 | length 80.6
  Top Layer w0.254: U1.19 501.654,252.928 516.95,268.224 564.128,268.224 568.046,264.307 PF1.20
NetPF1_21: PF1.21 U11.20 | length 80.6
  Top Layer w0.254: U11.20 499.063,235.1 515.5,251.536 560.959,251.536 566.776,257.353 PF1.21
NetPF1_22: PF1.22 U1.18 | length 79.5
  Top Layer w0.254: U1.18 501.924,252.278 517.412,267.767 563.829,267.767 566.776,264.82 PF1.22
NetPF1_23: PF1.23 U11.21 | length 79.2
  Top Layer w0.254: U11.21 499.066,235.749 515.31,251.993 560.476,251.993 565.506,257.023 PF1.23
NetPF1_26: PF1.26 U1.17 | length 76.6
  Top Layer w0.254: U1.17 502.193,251.628 517.875,267.31 561.233,267.31 564.236,264.307 PF1.26
NetPF1_27: PF1.27 U6.14 | length 74.7
  Top Layer w0.254: U6.14 502.567,240.439 514.579,252.451 558.267,252.451 562.966,257.15 PF1.27
NetPF1_28: PF1.28 U1.16 | length 75.2
  Top Layer w0.254: U1.16 502.462,250.978 518.337,266.852 560.42,266.852 562.966,264.307 PF1.28
NetPF1_29: PF1.29 U6.15 | length 73.3
  Top Layer w0.254: U6.15 502.57,241.089 514.389,252.908 557.682,252.908 561.696,256.921 PF1.29
NetPF1_30: PF1.30 U1.15 | length 73.8
  Top Layer w0.254: U1.15 502.731,250.328 518.799,266.395 559.607,266.395 561.696,264.307 PF1.30
NetPF1_31: PF1.31 U6.16 | length 71.7
  Top Layer w0.254: U6.16 502.574,241.739 514.2,253.365 556.87,253.365 560.426,256.921 PF1.31
NetPF1_32: PF1.32 U1.14 | length 72.4
  Top Layer w0.254: U1.14 503.001,249.678 519.261,265.938 558.794,265.938 560.426,264.307 PF1.32
NetPF1_33: PF1.33 U6.17 | length 70.2
  Top Layer w0.254: U6.17 502.577,242.389 514.01,253.822 556.057,253.822 559.156,256.921 PF1.33
NetPF1_37: PF1.37 U6.18 | length 67.4
  Top Layer w0.254: U6.18 502.58,243.039 513.821,254.279 553.974,254.279 556.616,256.921 PF1.37
NetPF1_41: PF1.41 U6.19 | length 64.6
  Top Layer w0.254: U6.19 502.584,243.689 513.632,254.737 551.891,254.737 554.076,256.921 PF1.41
NetPF1_43: PF1.43 U6.20 | length 63
  Top Layer w0.254: U6.20 502.587,244.339 513.442,255.194 551.078,255.194 552.806,256.921 PF1.43
NetPF1_47: PF1.47 U6.21 | length 60.2
  Top Layer w0.254: U6.21 502.591,244.989 513.253,255.651 548.996,255.651 550.266,256.921 PF1.47
NetPF2_42: PF2.42 U13.21 | length 65
  Top Layer w0.254: U13.21 498.995,226.51 504.271,221.234 544.148,221.234 554.076,211.307 PF2.42@554.076,209.78
NetPF2_44: PF2.44 U13.20 | length 63.4
  Top Layer w0.254: U13.20 498.998,225.86 504.082,220.777 543.335,220.777 552.806,211.307 PF2.44@552.806,209.78
NetPF2_46: PF2.46 U13.19 | length 61.9
  Top Layer w0.254: U13.19 499.002,225.21 503.892,220.32 542.523,220.32 551.536,211.307 PF2.46@551.536,209.78
NetPF2_48: PF2.48 U13.18 | length 60.4
  Top Layer w0.254: U13.18 499.005,224.56 503.703,219.862 541.71,219.862 550.266,211.307 PF2.48@550.266,209.78
NetPF2_52: PF2.52 U13.17 | length 57.5
  Top Layer w0.254: U13.17 499.008,223.91 503.514,219.405 539.627,219.405 547.726,211.307 PF2.52@547.726,209.78
NetPF2_54: PF2.54 U13.16 | length 56
  Top Layer w0.254: U13.16 499.012,223.26 503.324,218.948 538.814,218.948 546.456,211.307 PF2.54@546.456,209.78
NetPF2_56: PF2.56 U13.15 | length 54.5
  Top Layer w0.254: U13.15 499.015,222.61 503.135,218.491 538.001,218.491 545.186,211.307 PF2.56@545.186,209.78
NetPF2_58: PF2.58 U13.14 | length 52.9
  Top Layer w0.254: U13.14 499.019,221.96 502.945,218.034 537.189,218.034 543.916,211.307 PF2.58@543.916,209.78
NetPF2_62: PF2.62 U15.21 | length 48.3
  Top Layer w0.254: U15.21 535.411,217.271 541.376,211.307 PF2.62@541.376,209.78
NetPF2_64: PF2.64 U15.20 | length 46.8
  Top Layer w0.254: U15.20 534.791,216.621 540.106,211.307 PF2.64@540.106,209.78
NetPF2_66: PF2.66 U15.19 | length 45.2
  Top Layer w0.254: U15.19 534.171,215.971 538.836,211.307 PF2.66@538.836,209.78
NetPF2_68: PF2.68 U15.18 | length 43.7
  Top Layer w0.254: U15.18 533.551,215.321 537.566,211.307 PF2.68@537.566,209.78
NetPF2_72: PF2.72 U15.17 | length 40.9
  Top Layer w0.254: U15.17 531.661,214.671 535.026,211.307 PF2.72@535.026,209.78
NetPF2_74: PF2.74 U15.16 | length 39.3
  Top Layer w0.254: U15.16 531.041,214.021 533.756,211.307 PF2.74@533.756,209.78
NetRP3_1: RP3.1 U2.1 | length 11.9
  Top Layer w0.254: RP3.1 532.939,240.204 535.559,242.824 538.861,242.824 539.623,242.062 U2.1
NetRP3_2: RP3.2 U3.1 | length 17.5
  Top Layer w0.254: RP3.2 533,241.154 535.178,243.332 544.068,243.332 545.138,242.262 U3.1
NetRP3_3: RP3.3 U4.1 | length 23.4
  Top Layer w0.254: RP3.3 532.911,241.954 534.797,243.84 549.529,243.84 550.654,242.715 U4.1
NetRP3_4: RP3.4 U5.1 | length 28.8
  Top Layer w0.254: RP3.4 533.099,242.904 534.514,244.319 554.384,244.319 556.169,242.534 U5.1
NetRP4_1: RP4.1 U7.1 | length 34.7
  Top Layer w0.254: RP4.1 531.923,244.776 532.257,245.11 559.99,245.11 561.685,243.415 U7.1
NetRP4_2: RP4.2 U8.1 | length 40.5
  Top Layer w0.254: RP4.2 565.169,245.726 567.2,243.695 U8.1
NetRP4_3: RP4.3 U9.1 | length 46.3
  Top Layer w0.254: RP4.3 569.83,246.526 572.716,243.64 U9.1
NetRP4_4: RP4.4 U10.1 | length 52.2
  Top Layer w0.254: RP4.4 574.341,247.476 578.231,243.586 U10.1
P14: P16.1 U6.6 | length 42.8
  Top Layer w0.254: P16.1@453.216,254.88 458.296,254.88 474.735,254.88 485.926,243.689 U6.6
T9: P30.1 U11.8 | length 83.4
  Top Layer w0.254: P30.1@412.819,239.76 417.899,239.76 417.899,239.972 420.116,242.189 474.442,242.189 483.481,233.149 U11.8
T10: P6.1 U1.8 | length 84
  Top Layer w0.254: P6.1@412.819,259.92 417.899,259.92 420.361,262.382 472.682,262.382 483.436,251.628 U1.8
T11: P5.1 U1.7 | length 104.6
  Top Layer w0.254: P5.1@392.62,259.92 397.7,259.92 400.924,263.144 472.567,263.144 483.433,252.278 U1.7
T12: P22.1 U6.10 | length 41.8
  Top Layer w0.254: P22.1@453.216,249.84 458.296,249.84 475.711,249.84 484.462,241.089 U6.10
U7: P32.1 U11.10 | length 41.4
  Top Layer w0.254: P32.1@453.216,239.76 458.296,239.76 475.032,239.76 482.943,231.849 U11.10
U10: P29.1 U11.7 | length 103.9
  Top Layer w0.254: P29.1@392.62,239.76 397.7,239.76 400.891,242.951 474.599,242.951 483.75,233.8 U11.7
U12: P20.1 U6.9 | length 63.2
  Top Layer w0.254: P20.1@433.017,249.84 438.097,249.84 439.844,251.587 474.853,251.587 484.701,241.739 U6.9
U13: P8.1 U1.9 | length 63.6
  Top Layer w0.254: P8.1@433.017,259.92 438.097,259.92 439.924,261.747 472.567,261.747 483.336,250.978 U1.9
U15: P13.1 U6.3 | length 105.2
  Top Layer w0.254: P13.1@392.62,254.88 397.7,254.88 400.884,258.064 474.345,258.064 486.77,245.639 U6.3
V7: P31.1 U11.9 | length 62.9
  Top Layer w0.254: P31.1@433.017,239.76 438.097,239.76 439.891,241.554 474.158,241.554 483.212,232.5 U11.9
V8: P26.1 U11.4 | length 84.4
  Top Layer w0.254: P26.1@412.819,244.8 417.899,244.8 420.368,247.269 474.599,247.269 486.119,235.749 U11.4
V10: P4.1 U1.6 | length 43.1
  Top Layer w0.254: P4.1@453.216,264.96 458.296,264.96 471.513,264.96 483.545,252.928 U1.6
V11: P3.1 U1.5 | length 64.5
  Top Layer w0.254: P3.1@433.017,264.96 438.097,264.96 439.837,266.7 470.535,266.7 483.657,253.578 U1.5
V12: P18.1 U6.8 | length 83.7
  Top Layer w0.254: P18.1@412.819,249.84 417.899,249.84 420.408,252.349 475.107,252.349 485.067,242.389 U6.8
V13: P10.1 U1.10 | length 42.1
  Top Layer w0.254: P10.1@453.216,259.92 458.296,259.92 473.632,259.92 483.224,250.328 U1.10
W8: P25.1 U11.3 | length 104.9
  Top Layer w0.254: P25.1@392.62,244.8 397.7,244.8 400.931,248.031 475.107,248.031 486.738,236.4 U11.3
W13: P17.1 U6.7 | length 104.3
  Top Layer w0.254: P17.1@392.62,249.84 397.7,249.84 400.971,253.111 475.234,253.111 485.306,243.039 U6.7
W14: P15.1 U6.5 | length 64.1
  Top Layer w0.254: P15.1@433.017,254.88 438.097,254.88 439.757,256.54 473.964,256.54 486.165,244.339 U6.5
Y6: P27.1 U11.5 | length 63.8
  Top Layer w0.254: P27.1@433.017,244.8 438.097,244.8 439.804,246.507 474.091,246.507 485.498,235.1 U11.5
Y7: P28.1 U11.6 | length 42.5
  Top Layer w0.254: P28.1@453.216,244.8 458.296,244.8 474.528,244.8 484.879,234.449 U11.6
Y8: P2.1 U1.4 | length 85.1
  Top Layer w0.254: P2.1@412.819,264.96 417.899,264.96 420.401,267.462 470.535,267.462 483.769,254.228 U1.4
Y9: P1.1 U1.3 | length 105.6
  Top Layer w0.254: P1.1@392.62,264.96 397.7,264.96 400.964,268.224 470.662,268.224 484.008,254.878 U1.3
Y14: P14.1 U6.4 | length 84.7
  Top Layer w0.254: P14.1@412.819,254.88 417.899,254.88 420.321,257.302 474.218,257.302 486.531,244.989 U6.4
pads on no net: E1.1 E2.1 E3.1 E4.1 E5.1 E6.1 PF1.3 PF1.5 PF1.6 PF1.8 PF1.10 PF1.12 PF1.14 PF1.15 PF1.36 PF1.38 PF1.39 PF1.40 PF1.42 PF1.45 PF1.46 PF1.48 PF1.49 PF1.50 PF1.51 PF1.52 PF1.53 PF1.55 PF1.56 PF1.57 PF1.58 PF1.59 PF1.60 PF1.61 PF1.62 PF1.63 PF1.64 PF1.65 PF1.66 PF1.69 PF1.70 PF1.71 PF1.72 PF1.73 PF1.74 PF1.75 PF1.76 PF1.77 PF1.78 PF1.79 PF1.80 PF2.3 PF2.5 PF2.6 PF2.7 PF2.8 PF2.9 PF2.11 PF2.12 PF2.13 PF2.14 PF2.15 PF2.16 PF2.17 PF2.18 PF2.19 PF2.21 PF2.23 PF2.25 PF2.27 PF2.29 PF2.31 PF2.33 PF2.35 PF2.37 PF2.39 PF2.41 PF2.51 PF2.61 PF2.70 PF2.71
copper on no net:
  other v2: 384.937,192.532 475.615,192.532 583.184,192.532 382.905,193.675 386.969,193.675 473.583,193.675 477.647,193.675 581.152,193.675 585.216,193.675 382.905,196.088 473.583,196.088 581.152,196.088 386.937,196.118 477.615,196.118 585.184,196.118 384.937,197.104 475.615,197.104 583.184,197.104 384.937,269.621 475.615,269.621 583.184,269.621 382.905,270.764 386.969,270.764 473.583,270.764 477.647,270.764 581.152,270.764 585.216,270.764 382.905,273.177 473.583,273.177 581.152,273.177 386.937,273.207 477.615,273.207 585.184,273.207 384.937,274.193 475.615,274.193 583.184,274.193

## Polygon pours and split planes (outlines as drawn)
GND on Bottom Layer "GND_L02_P000" (solid, remove dead copper, pour order 0): 380.238,193.294 382.905,190.627 586.486,190.627 589.915,194.056 589.915,272.796 586.359,276.352 383.286,276.352 380.238,273.304

## Other copper
Top Layer:
  text "Tinker Zynq Ext. Board   v1   mhc   DEC 8 2016" at 394.97,192.532 h4

## Silkscreen, mask and mechanical layers (free items; w line width, h text height)
Top Overlay:
  drawing of 28 lines, arcs and shapes, not listed
  text "OUTPUT 5V" at 382.905,266.573 h4 r270
  text "5 3 G" at 490.728,266.065 h1.8
  text "RP4: IN1: B19 A20 D19 D20" at 533.273,251.606 h2
  text "RP3: IN2: F16 F17 M17 M18" at 533.273,248.412 h2
  text "510Ω 5-13V   1.2kΩ 7-30V" at 532.873,243.586 h3.8
  text "IN 3-5V" at 381.381,226.314 h1.6 r270
  text "IN1" at 381.635,212.471 h2
  text "IN2" at 381.508,208.28 h2
  text "485" at 381.254,205.486 h2 r270
Top Solder:
  text "Tinker Zynq Ext. Board   v1   mhc   DEC 8 2016" at 394.97,192.532 h4
Mechanical 1:
  the board outline again, w0.254
Drill Drawing:
  text ".Legend" at 592.455,199.517 h1.52

## Text inside footprints (layer, text, board x,y; h text height)
PD1: Top Overlay "2" at 541.147,195.072 h1.27; Top Overlay "1" at 541.655,192.532 h1.27; Top Overlay "9" at 555.371,192.532 h1.27; Top Overlay "10" at 555.371,195.072 h1.27
PF1: Top Overlay "79" at 527.126,258.38 h1; Top Overlay "1" at 580.446,258.38 h1; Top Overlay "2" at 580.446,262.28 h1; Top Overlay "80" at 527.126,262.28 h1
PF2: Top Overlay "79" at 527.151,205.367 h1; Top Overlay "1" at 580.471,205.367 h1; Top Overlay "2" at 580.471,209.267 h1; Top Overlay "80" at 527.151,209.267 h1